# EAGLE board c64saver_1.2 (EAGLE 6.0)
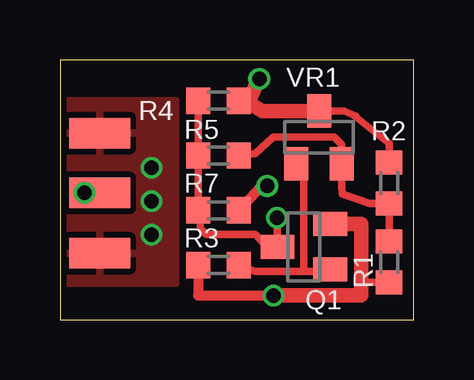
[diagram p0: board, top side]
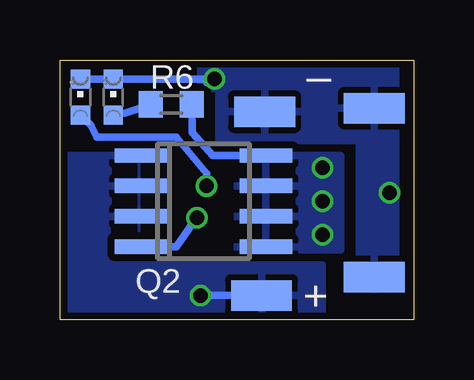
[diagram p1: board, bottom side, seen from below]

Size 14.75 x 10.85 mm. Coordinates in mm from the lower left corner, seen from the top.
Outline: 0,0 14.75,0 14.75,10.85 0,10.85 0,0
Copper layers (1*16): Top 0.035mm / dielectric 1.5mm / Bottom 0.035mm
Design rules: minimum track width 5mil, minimum drill 12mil, track to track 5mil, track to pad 5mil, pad to pad 5mil, via to via 5mil, smd to smd 0mil, copper to edge 10mil, drill to drill 10mil, minimum pad ring 10mil, minimum via ring 6mil, stop-mask expansion 2mil, vias tented up to drill 25mil, thermal gap 10mil

## Footprints (pad centres in the part's own frame; a part is rotated, then mirrored left to right if it is on the bottom)
CHIPLED_0603 = smd 0.8 x 0.8: A 0,-0.75; C 0,0.75
SMD1,27-2,54 = smd 1.27 x 2.54: 1 0,0
SOT23 = smd 1 x 1.4: 1 -0.95,-1.1; 2 0.95,-1.1; 3 0,1.1
SO-08 = smd 0.6 x 2.2: 1 -1.905,-2.6; 2 -0.635,-2.6; 3 0.635,-2.6; 4 1.905,-2.6; 5 1.905,2.6; 6 0.635,2.6; 7 -0.635,2.6; 8 -1.905,2.6
R0603 = smd 1 x 1.1: 1 -0.85,0; 2 0.85,0

## Placement (x,y rotation side)
LED1  green  [CHIPLED_0603]  12.52,9.3 0 bottom
LED3  red  [CHIPLED_0603]  13.89,9.3 0 bottom
PAD1  [SMD1,27-2,54]  6.35,1.02 270 bottom
PAD2  [SMD1,27-2,54]  6.22,8.69 270 bottom
PAD3  [SMD1,27-2,54]  1.65,2.78 270 top
PAD4  [SMD1,27-2,54]  1.65,5.3 270 top
PAD5  [SMD1,27-2,54]  1.65,7.79 270 top
PAD6  [SMD1,27-2,54]  1.65,8.83 270 bottom
PAD7  [SMD1,27-2,54]  1.65,1.78 270 bottom
Q1  BSS84  [SOT23]  10.16,3.05 90 top
Q2  IRF9332PBF  [SO-08]  8.76,4.95 270 bottom
R1  3k9  [R0603]  13.72,2.41 270 top
R2  3k3  [R0603]  13.72,5.71 270 top
R3  3k3  [R0603]  6.6,2.29 180 top
R4  3k9  [R0603]  6.6,9.14 180 top
R5  330k  [R0603]  6.6,6.86 0 top
R6  1k  [R0603]  10.11,8.99 0 bottom
R7  1k  [R0603]  6.6,4.57 180 top
VR1  TL431  [SOT23]  10.79,7.62 0 top

## Library data of the parts
LED1 LED3 = led
PAD1-PAD7 = wirepad
Q1 = transistor-small-signal
Q2 = transistor-power
R1-R7 = rcl
VR1 = v-reg

## Nets
5VSAFE: PAD3.1 PAD5.1 Q2.5 Q2.6 Q2.7 Q2.8 R6.2
+5V: PAD1.1 Q1.2 Q2.1 Q2.2 Q2.3 R1.2 R3.2
GND: LED1.C LED3.C PAD2.1 PAD4.1 PAD6.1 PAD7.1 R2.1 R4.1 VR1.3
N$1: LED3.A R7.1
N$2: R1.1 R2.2 R5.2 VR1.2
N$3: LED1.A R6.1
N$5: Q1.1 R3.1 VR1.1
N$7: Q1.3 Q2.4 R4.2 R5.1 R7.2

## Tracks (layer width: path | path; a pad name or v marks a point on that pad's centre or on a via)
5VSAFE  (via drill 0.6)
  Bottom 0.305: Q2.8 8.38,6.86 9.25,7.82 R6.2
  other vias: 3.81,6.35 3.81,4.95 3.81,3.56
  pour Bottom (isolate 0.305): 3.05,6.86 7.37,6.86 7.37,2.92 3.05,2.92
  pour Top (isolate 0.254): 0.25,9.14 4.83,9.14 4.83,1.52 0.25,1.52
+5V  (via drill 0.6)
  Top 0.305: 12.55,4 | 12.55,1.57 R1.2 | R3.2 5.75,1.87
  Top 0.406: 5.75,1.87 5.75,1.02 v8.89,1.02
  Top 0.61: Q1.2 12.55,4 12.55,1.57 | 12.55,4 12.55,1.02 v8.89,1.02
  Bottom 0.305: v8.89,1.02 PAD1.1
  pour Bottom (isolate 0.305): 11.56,6.86 11.56,2.29 3.81,2.29 3.81,0 14.75,0 14.75,6.86
GND  (via drill 0.6)
  Top 0.305: VR1.3 11.85,8.72 12.32,8.51 12.28,8.51 13.72,7.37 R2.1 13.97,6.86 | R4.1 7.79,9.11 7.83,9.11
  Top 0.406: PAD4.1 1.91,5.31 v1.02,5.31
  Top 0.61: 7.79,9.11 8.43,8.72 VR1.3 | 7.83,9.11 v8.31,10.06
  Bottom 0.305: 8.13,9.91 8.14,9.89 8.64,9.91 8.64,10.05 LED1.C LED3.C
  pour Bottom (isolate 0.305): 0.76,10.79 0.76,1.27 2.29,1.27 2.29,7.47 8.13,7.49 8.13,9.65 8.89,9.65 8.89,10.67 8.76,10.79
N$1  (via drill 0.6)
  Top 0.406: v8.64,5.59 8.38,5.59 R7.1
  Bottom 0.305: LED3.A 13.46,8.13 13.21,7.62 9.91,7.62 8.64,6.1 v8.64,5.59
N$2
  Top 0.305: R1.1 R2.2 12.91,4.87 11.76,5.26 11.75,5.55 VR1.2 11.74,7.3 11.43,7.62 8.89,7.62 8.13,6.95 R5.2
N$3
  Bottom 0.305: LED1.A 12.03,8.64 R6.1
N$5
  Top 0.305: VR1.1 10.16,7.03 10.16,2.03 | 10.16,2.03 11.26,2.03 Q1.1 | R3.1 7.37,2.29 8.13,2.03 10.16,2.03
N$7  (via drill 0.6)
  Top 0.305: R4.2 5.77,8.8 R5.1 R7.2 5.84,4.48 5.84,3.81 6.1,3.56 8.13,3.56 8.64,3.05 Q1.3 v9.04,4.27
  Bottom 0.305: Q2.4 9.91,3.05 v9.04,4.27

## Text on the board
bNames: _ | +
bStop: -